# EAGLE board IGBS-Rocket-v2_rev1 (EAGLE 9.6.2), part 1 of 2
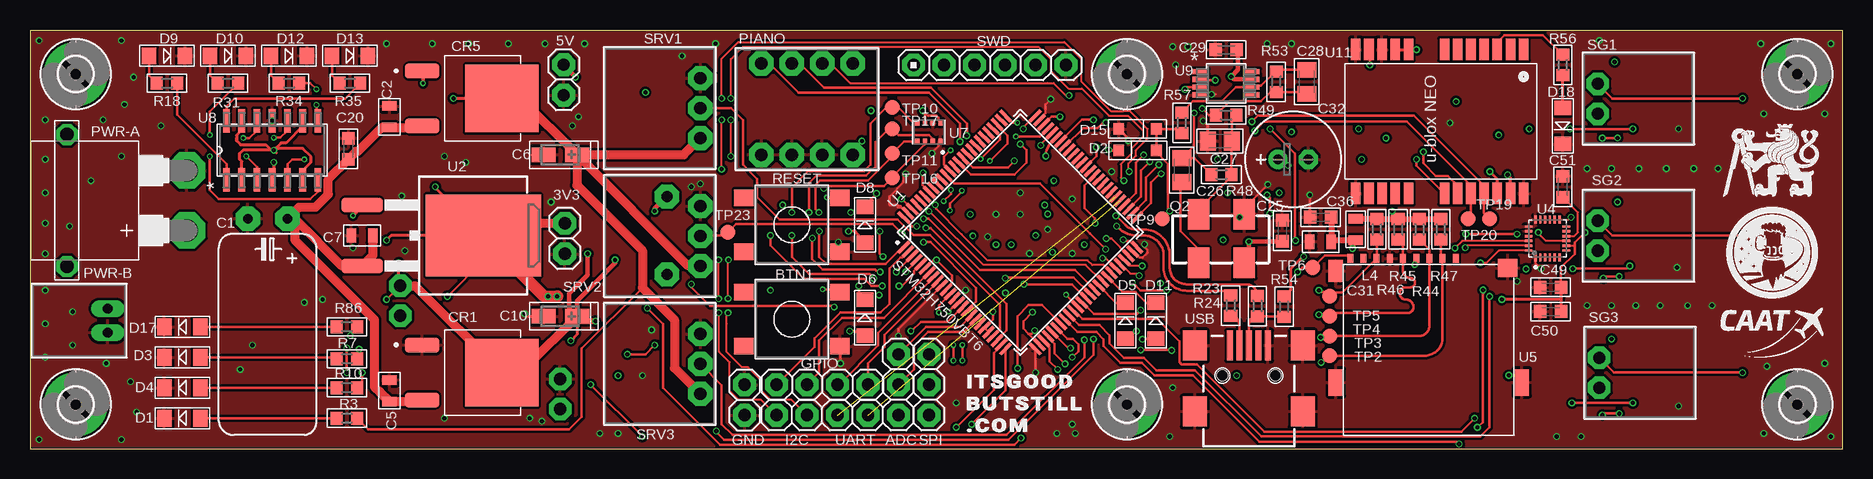
[diagram p0: board, top side]
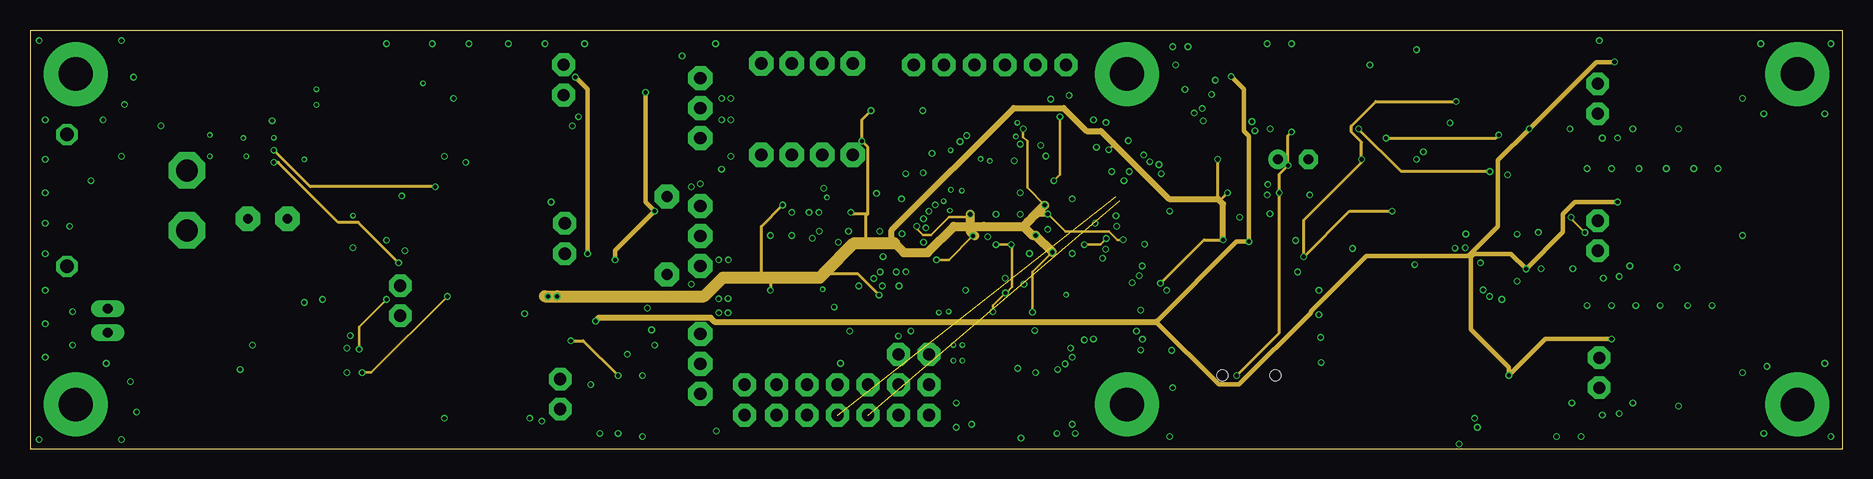
[diagram p1: board, inner layer Route2]
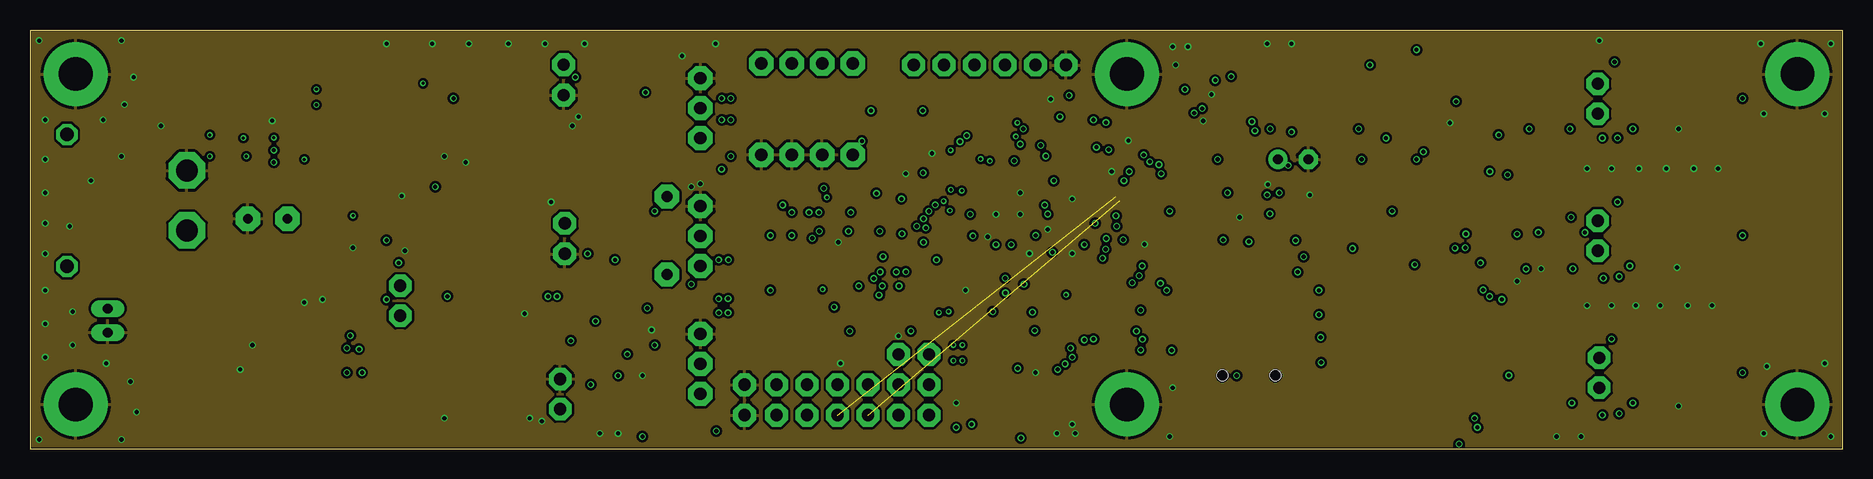
[diagram p2: board, inner layer Route15]
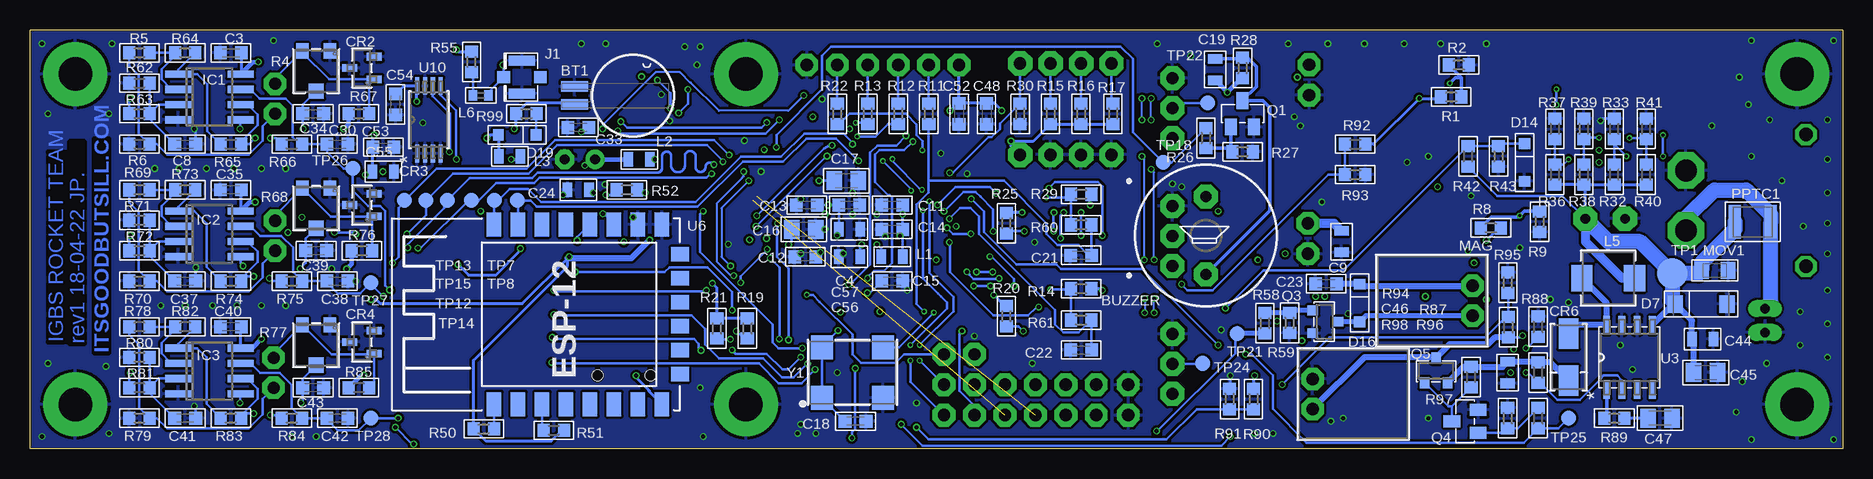
[diagram p3: board, bottom side, seen from below]

Size 151.11 x 34.92 mm. Coordinates in mm from the lower left corner, seen from the top.
Outline: 0,0 151.11,0 151.11,34.92 0,34.92 0,0
Copper layers (1*2*15*16): Top 0.035559375mm / dielectric 0.17018125mm / Route2 0.01778125mm / dielectric 47mil / Route15 0.01778125mm / dielectric 0.17018125mm / Bottom 0.035559375mm
Design rules "jlcpcb-4-layer": minimum track width 5mil, minimum drill 0.2mm, track to track 0.126490625mm, track to pad 0.126490625mm, pad to pad 0.126490625mm, via to via 0.126490625mm, smd to smd 0mil, copper to edge 0.1mm, drill to drill 5mil, minimum pad ring 4mil, minimum via ring 4mil, stop-mask expansion 3mil, vias tented up to drill 100mil, thermal gap 10mil
Net classes: 0 default: width 0.178 mm, drill 0.254 mm, clearance 0.203 mm

## Footprints (pad centres in the part's own frame; a part is rotated, then mirrored left to right if it is on the bottom)
1X02 = drill 1.016 pad 1.905 octagon: 1 -1.27,0; 2 1.27,0
CONN_S2B-XH-A_JST = drill 1.016 pad 1.88 octagon: 1 0,0; 2 2.5,0
1X03 = drill 1.016 pad 1.905 octagon: 1 -2.54,0; 2 0,0; 3 2.54,0
BATTCON-6.8MM = smd 2.25 x 0.85: + 4.87,0.75; - 4.87,-0.75
SW_B3FS-1000_OMR = smd 1.6 x 1.4: 1 -4,2.25; 2 4,2.25; 3 -4,-2.25; 4 4,-2.25
BUZZER-12MM = drill 0.914 pad 2.032 octagon: + 3.25,0; - -3.25,0
TT2D7L = drill 0.813 pad 2.032 octagon: + -1.651,-0.127; - 1.651,-0.127
0805-CAP = smd 0.8 x 1.2: 1 -0.9,0; 2 0.9,0
C0603K = smd 1.05 x 1.08: 1 -0.875,0; 2 0.875,0
CT3216 = smd 2 x 1.2: + -1.4,0; - 1.4,0
C0805K = smd 1.3 x 1.6: 1 -1,0; 2 1,0
E2,5-7 = drill 0.813 pad 1.6: + -1.27,0 | drill 0.813 pad 1.6 octagon: - 1.27,0
DPAK229P990X239-3N = smd 1.22 x 2.83: 1 -2.29,-4.14; 3 2.29,-4.14 | smd 5.63 x 6.1: 2 0,2.51
SOT23_TO-236AB_NEX = smd 0.635 x 1.27: 1 -0.95,-1.016; 2 0.95,-1.016; 3 0,1.016
DIODE_DO214AC = smd 2.54 x 1.651: 1 -1.959,0; 2 1.959,0
LED-1206 = smd 1.2 x 1.4: A -1.5,0; C 1.5,0
SOD-123 = smd 0.9 x 0.95: A 1.575,0; C -1.575,0
SMA-DIODE = smd 1.27 x 1.47: A -2.15,0; C 2.15,0
1X04 = drill 1.016 pad 1.905 octagon: 1 -3.81,0; 2 -1.27,0; 3 1.27,0; 4 3.81,0
2,8-PAD = drill 2.8 pad 5.334: B2,8 0,0
SO08 = smd 0.6 x 2.2: 1 -1.905,-2.6; 2 -0.635,-2.6; 3 0.635,-2.6; 4 1.905,-2.6; 5 1.905,2.6; 6 0.635,2.6; 7 -0.635,2.6; 8 -1.905,2.6
U.FL = smd 2.2 x 0.85: P$1 0,1.375; P$2 0,-1.375 | smd 1.05 x 1: P$3 1.525,0; P$4 -1.525,0
0805 = smd 0.8 x 1.2: 1 -0.9,0; 2 0.9,0
IND_74437_WRE = smd 1.778 x 2.21: 1 -2.201,0; 2 2.201,0
C0402 = smd 0.7 x 0.9: 1 -0.65,0; 2 0.65,0
CT/CN0805 = smd 1.2 x 1.4: 1 -1.1,0; 2 1.1,0
SW_A6FR-4101_OMR = drill 1.016 pad 2.032 octagon: 1 -7.62,7.62; 2 -7.62,5.08; 3 -7.62,2.54; 4 -7.62,0; 5 0,0; 6 0,2.54; 7 0,5.08; 8 0,7.62
1210 = smd 1 x 2.8: 1 -1.5,0; 2 1.5,0
XT30PW-M = drill 1.803 pad 3.048 octagon: + -2.5,0; - 2.5,0 | drill 1.118 pad 1.778 octagon: P$3 -5.5,10; P$4 5.5,10
CONN_S2B-PH-K-S_JST = drill 0.813 pad 1.397 long: 1 0,0; 2 2,0
SOT23-BEC = smd 1 x 1.4: B -0.95,-1.1; C 0,1.1; E 0.95,-1.1
ENC-03RC = smd 1.778 x 2.54: 1 -4.191,1.524; 2 -0.381,1.524; 3 -0.381,-2.54; 4 -4.191,-2.54
SOT23-3 = smd 0.8 x 0.9: 1 -0.95,-1; 2 0.95,-1; 3 0,1.1
R0603 = smd 1 x 1.1: 1 -0.85,0; 2 0.85,0
RES_C01R00 = smd 1.016 x 1.27: 1 1.15,-1.675; 3 -1.15,-1.675 | smd 1.27 x 1.27: 2 0,1.675
CONN_S3B-XH-A(LF)(SN)_JST = drill 1.016 pad 2.032 octagon: 1 0,0; 2 2.5,0; 3 5,0
1X06 = drill 1.016 pad 1.905 octagon: 1 -6.35,0; 2 -3.81,0; 3 -1.27,0; 4 1.27,0; 5 3.81,0; 6 6.35,0
B2,54 = smd 2.54 x 2.54: TP 0,0
B1,27 = smd 1.27 x 1.27: TP 0,0
LQFP100-14X14MM = smd 1.27 x 0.292: 1 -7.75,6; 2 -7.75,5.5; 3 -7.75,5; 4 -7.75,4.5; 5 -7.75,4; 6 -7.75,3.5; 7 -7.75,3; 8 -7.75,2.5; 9 -7.75,2; 10 -7.75,1.5; 11 -7.75,1; 12 -7.75,0.5; 13 -7.75,0; 14 -7.75,-0.5; 15 -7.75,-1; 16 -7.75,-1.5; 17 -7.75,-2; 18 -7.75,-2.5; 19 -7.75,-3; 20 -7.75,-3.5; 21 -7.75,-4; 22 -7.75,-4.5; 23 -7.75,-5; 24 -7.75,-5.5; 25 -7.75,-6; 51 7.75,-6; 52 7.75,-5.5; 53 7.75,-5; 54 7.75,-4.5; 55 7.75,-4; 56 7.75,-3.5; 57 7.75,-3; 58 7.75,-2.5; 59 7.75,-2; 60 7.75,-1.5; 61 7.75,-1; 62 7.75,-0.5; 63 7.75,0; 64 7.75,0.5; 65 7.75,1; 66 7.75,1.5; 67 7.75,2; 68 7.75,2.5; 69 7.75,3; 70 7.75,3.5; 71 7.75,4; 72 7.75,4.5; 73 7.75,5; 74 7.75,5.5; 75 7.75,6 | smd 0.292 x 1.27: 26 -6,-7.75; 27 -5.5,-7.75; 28 -5,-7.75; 29 -4.5,-7.75; 30 -4,-7.75; 31 -3.5,-7.75; 32 -3,-7.75; 33 -2.5,-7.75; 34 -2,-7.75; 35 -1.5,-7.75; 36 -1,-7.75; 37 -0.5,-7.75; 38 0,-7.75; 39 0.5,-7.75; 40 1,-7.75; 41 1.5,-7.75; 42 2,-7.75; 43 2.5,-7.75; 44 3,-7.75; 45 3.5,-7.75; 46 4,-7.75; 47 4.5,-7.75; 48 5,-7.75; 49 5.5,-7.75; 50 6,-7.75; 76 6,7.75; 77 5.5,7.75; 78 5,7.75; 79 4.5,7.75; 80 4,7.75; 81 3.5,7.75; 82 3,7.75; 83 2.5,7.75; 84 2,7.75; 85 1.5,7.75; 86 1,7.75; 87 0.5,7.75; 88 0,7.75; 89 -0.5,7.75; 90 -1,7.75; 91 -1.5,7.75; 92 -2,7.75; 93 -2.5,7.75; 94 -3,7.75; 95 -3.5,7.75; 96 -4,7.75; 97 -4.5,7.75; 98 -5,7.75; 99 -5.5,7.75; 100 -6,7.75
TO263 = smd 1.219 x 3.429: 1 -2.54,-6.6; 3 2.54,-6.6 | smd 6.8 x 9.6: 2 0,3.5
SOIC8_ONS = smd 1.493 x 0.558: 1 -2.702,1.905; 2 -2.702,0.635; 3 -2.702,-0.635; 4 -2.702,-1.905; 5 2.702,-1.905; 6 2.702,-0.635; 7 2.702,0.635; 8 2.702,1.905
QFN40P300X300X105-24N = smd 0.66 x 0.198: 1 -1.575,1; 2 -1.575,0.6; 3 -1.575,0.2; 4 -1.575,-0.2; 5 -1.575,-0.6; 6 -1.575,-1; 13 1.575,-1; 14 1.575,-0.6; 15 1.575,-0.2; 16 1.575,0.2; 17 1.575,0.6; 18 1.575,1 | smd 0.198 x 0.66: 7 -1,-1.575; 8 -0.6,-1.575; 9 -0.2,-1.575; 10 0.2,-1.575; 11 0.6,-1.575; 12 1,-1.575; 19 1,1.575; 20 0.6,1.575; 21 0.2,1.575; 22 -0.2,1.575; 23 -0.6,1.575; 24 -1,1.575
MICROSD-PUSH-OUT = smd 0.5 x 0.75: 1 9.625,0.225; 2 8.525,0.225; 3 7.425,0.225; 4 6.325,0.225; 5 5.225,0.225; 6 4.125,0.225; 7 3.025,0.225; 8 1.925,0.225; CD 0.825,0.225 | smd 1.2 x 1.8: G1 -0.375,-0.8 | smd 1.2 x 2.2: G2 -0.375,-10.1; G4 15.125,-10.1 | smd 1.6 x 1.5: G3 13.95,-0.55
ESP-12E = smd 2 x 1.2: ADC -7.46,5.53; EN -7.46,3.53; GND 7.54,-6.47; IO0 7.54,-0.47; IO2 7.54,-2.47; IO4 7.54,1.53; IO5 7.54,3.53; IO12 -7.46,-2.47; IO13 -7.46,-4.47; IO14 -7.46,-0.47; IO15 7.54,-4.47; IO16 -7.46,1.53; RST -7.46,7.53; RXD/IO3 7.54,5.53; TXD/IO1 7.54,7.53; VCC -7.46,-6.47 | smd 1.2 x 1.5: CS0 -4.96,-7.97; IO9 -0.96,-7.97; IO10 1.04,-7.97; MISO -2.96,-7.97; MOSI 3.04,-7.97; SCLK 5.04,-7.97
XDCR_BMP280 = smd 0.5 x 0.35: 1 0.8,0.975; 2 0.8,0.325; 3 0.8,-0.325; 4 0.8,-0.975; 5 -0.8,-0.975; 6 -0.8,-0.325; 7 -0.8,0.325; 8 -0.8,0.975
D14 = smd 1.97 x 0.558: 1 -2.464,3.81; 2 -2.464,2.54; 3 -2.464,1.27; 4 -2.464,0; 5 -2.464,-1.27; 6 -2.464,-2.54; 7 -2.464,-3.81; 8 2.464,-3.81; 9 2.464,-2.54; 10 2.464,-1.27; 11 2.464,0; 12 2.464,1.27; 13 2.464,2.54; 14 2.464,3.81
MSOP8_MS_MCH = smd 1.302 x 0.432: 1 -2.15,0.975; 2 -2.15,0.325; 3 -2.15,-0.325; 4 -2.15,-0.975; 5 2.15,-0.975; 6 2.15,-0.325; 7 2.15,0.325; 8 2.15,0.975
TSSOP8_MC_MCH = smd 1.462 x 0.355: 1 -2.819,0.975; 2 -2.819,0.325; 3 -2.819,-0.325; 4 -2.819,-0.975; 5 2.819,-0.975; 6 2.819,-0.325; 7 2.819,0.325; 8 2.819,0.975
NEO-M8 = smd 1.8 x 0.8: 1 6.4,-7.4; 2 6.4,-6.3; 3 6.4,-5.2; 4 6.4,-4.1; 5 6.4,-3; 6 6.4,-1.9; 7 6.4,-0.8; 8 6.4,2.2; 9 6.4,3.3; 10 6.4,4.4; 11 6.4,5.5; 12 6.4,6.6; 13 -5.6,6.6; 14 -5.6,5.5; 15 -5.6,4.4; 16 -5.6,3.3; 17 -5.6,2.2; 18 -5.6,-0.8; 19 -5.6,-1.9; 20 -5.6,-3; 21 -5.6,-4.1; 22 -5.6,-5.2; 23 -5.6,-6.3; 24 -5.6,-7.4
USB-MINIB = smd 2.5 x 0.5: D+ 2.5,0; D- 2.5,0.8; GND 2.5,-1.6; ID 2.5,-0.8; VBUS 2.5,1.6 | smd 2.5 x 2: MTN1 -3,4.5; MTN2 2.5,4.5; MTN3 -3,-4.5; MTN4 2.5,-4.5 | hole 0.9: 0,2.2; 0,-2.2
OSCILLATOR-SMD-7X5-4PAD = smd 1.8 x 2: 1 -2.54,-2.095; 2 2.54,-2.095; 3 2.54,2.104; 4 -2.54,2.104

## Placement (x,y rotation side)
3V3  [1X02]  44.58,17.53 270 top
5V  [1X02]  44.48,30.76 270 top
12V-CAM  S2B-XH-A(LF)(SN)CONN_S2B-XH-A_JST  [CONN_S2B-XH-A_JST]  44.2,3.3 90 bottom
ADC  [1X03]  72.39,5.33 270 top
BT1  MS621FE-3V  [BATTCON-6.8MM]  100.84,29.46 180 bottom
BTN1  B3FS-1000SW_B3FS-1000_OMR  [SW_B3FS-1000_OMR]  63.5,10.79 0 top
BUZZER  BUZZERPTH  [BUZZER-12MM]  53.09,17.78 90 bottom
C1  680u  [TT2D7L]  19.81,19.05 180 top
C2  10u  [0805-CAP]  29.97,27.69 90 top
C3  100n  [C0603K]  134.37,33.02 0 bottom
C4  100n  [C0603K]  82.8,20.32 180 bottom
C5  10u  [0805-CAP]  29.97,4.83 90 top
C6  10u Tant  [CT3216]  44.2,24.51 180 top
C7  10u  [0805-CAP]  27.69,17.78 180 top
C8  1u  [C0603K]  138.18,25.4 180 bottom
C9  10u  [0805-CAP]  41.78,17.27 270 bottom
C10  10u Tant  [CT3216]  44.2,11.05 180 top
C11  100n  [C0603K]  79.25,20.32 0 bottom
C12  100n  [C0603K]  86.49,16 0 bottom
C13  100n  [C0603K]  86.36,20.32 0 bottom
C14  100n  [C0603K]  79.25,18.29 0 bottom
C15  100n  [C0603K]  79.25,13.97 180 bottom
C16  2u2  [C0805K]  86.61,18.29 0 bottom
C17  2u2  [C0805K]  83.06,22.35 180 bottom
C18  100n  [C0603K]  82.3,2.29 180 bottom
C19  10u  [0805-CAP]  52.32,31.62 90 bottom
C20  100n  [C0603K]  26.54,25.02 270 top
C21  100n  [C0603K]  63.5,16.13 180 bottom
C22  100n  [C0603K]  63.5,8.23 180 bottom
C23  100n  [C0603K]  43.08,13.76 180 bottom
C24  10u  [0805-CAP]  105.41,21.59 180 bottom
C25  100n  [C0603K]  104.39,18.16 270 top
C26  4u7  [C0805K]  96.01,23.24 270 top
C27  4u7  [C0805K]  99.19,25.65 180 top
C28  1u8  [C0805K]  106.43,30.61 90 top
C29  100n  [C0603K]  99.69,33.27 0 top
C30  1u  [C0603K]  125.48,25.4 180 bottom
C31  10u  [0805-CAP]  107.57,17.27 180 top
C32  330u  [E2,5-7]  105.28,24.13 0 top
C33  100n  [C0603K]  105.41,26.8 180 bottom
C34  1u  [C0603K]  127.51,27.94 180 bottom
C35  100n  [C0603K]  134.37,21.59 0 bottom
C36  100n  [C0603K]  107.57,19.3 180 top
C37  1u  [C0603K]  138.18,13.97 180 bottom
C38  1u  [C0603K]  125.48,13.97 180 bottom
C39  1u  [C0603K]  127.25,16.51 180 bottom
C40  100n  [C0603K]  134.37,10.16 0 bottom
C41  1u  [C0603K]  138.18,2.54 180 bottom
C42  1u  [C0603K]  125.48,2.54 180 bottom
C43  1u  [C0603K]  127.51,5.08 180 bottom
C44  22u  [0805-CAP]  11.68,9.14 0 bottom
C45  100n  [C0805K]  11.43,6.35 180 bottom
C46  22u  [0805-CAP]  27.94,6.35 270 bottom
C47  10n  [C0805K]  15.24,2.54 180 bottom
C48  100n  [C0603K]  71.37,27.94 90 bottom
C49  100n  [C0603K]  126.75,13.46 0 top
C50  100n  [C0603K]  126.75,11.43 0 top
C51  100n  [C0603K]  127.76,21.84 270 top
C52  100n  [C0603K]  73.66,27.94 90 bottom
C53  100n  [C0603K]  121.67,25.15 0 bottom
C54  100n  [C0603K]  120.65,28.7 270 bottom
C55  10u  [0805-CAP]  121.67,23.11 0 bottom
C56  10u  [0805-CAP]  82.8,16 180 bottom
C57  10u  [0805-CAP]  82.8,18.29 0 bottom
CR1  LD1117DT50  [DPAK229P990X239-3N]  36.83,6.35 270 top
CR2  TS4040DILT-2.5  [SOT23_TO-236AB_NEX]  123.44,31.75 90 bottom
CR3  TS4040DILT-2.5  [SOT23_TO-236AB_NEX]  123.44,20.32 90 bottom
CR4  TS4040DILT-2.5  [SOT23_TO-236AB_NEX]  123.44,8.89 90 bottom
CR5  AZ2185D  [DPAK229P990X239-3N]  36.83,29.21 270 top
CR6  SS12  [DIODE_DO214AC]  22.86,7.62 90 bottom
D1  GREEN  [LED-1206]  12.7,2.54 180 top
D2  3V6  [SOD-123]  92.33,24.89 0 top
D3  GREEN  [LED-1206]  12.7,7.62 180 top
D4  GREEN  [LED-1206]  12.7,5.08 180 top
D5  GREEN  [LED-1206]  91.31,10.67 90 top
D6  GREEN  [LED-1206]  69.6,10.92 90 top
D7  TVSSMA  [SMA-DIODE]  11.81,12.06 180 bottom
D8  GREEN  [LED-1206]  69.6,18.67 90 top
D9  GREEN  [LED-1206]  11.43,32.77 0 top
D10  GREEN  [LED-1206]  16.51,32.77 0 top
D11  GREEN  [LED-1206]  93.85,10.67 90 top
D12  GREEN  [LED-1206]  21.59,32.77 0 top
D13  GREEN  [LED-1206]  26.67,32.77 0 top
D14  3V6  [SOD-123]  26.54,23.88 270 bottom
D15  3V6  [SOD-123]  92.33,26.67 180 top
D16  1N4148  [SOD-123]  40.27,12.15 270 bottom
D17  GREEN  [LED-1206]  12.7,10.16 180 top
D18  GREEN  [LED-1206]  127.76,26.92 270 top
D19  1N4148  [SOD-123]  110.49,26.16 180 bottom
GND  [1X02]  59.56,4.06 90 top
GPIO  [1X04]  66.04,5.33 0 top
H1  MOUNT-PAD-ROUND2.8  [2,8-PAD]  147.32,31.24 0 top
H2  MOUNT-PAD-ROUND2.8  [2,8-PAD]  147.32,3.68 0 top
H3  MOUNT-PAD-ROUND2.8  [2,8-PAD]  3.81,3.68 0 top
H4  MOUNT-PAD-ROUND2.8  [2,8-PAD]  3.81,31.24 0 top
H5  MOUNT-PAD-ROUND2.8  [2,8-PAD]  91.44,31.24 0 top
H6  MOUNT-PAD-ROUND2.8  [2,8-PAD]  91.44,3.68 0 top
I2C  [1X02]  63.5,2.79 180 top
IC1  NCV21872DR2G  [SO08]  136.14,29.34 270 bottom
IC2  NCV21872DR2G  [SO08]  136.14,17.91 270 bottom
IC3  NCV21872DR2G  [SO08]  136.14,6.48 270 bottom
J1  U.FL  [U.FL]  110.11,30.99 180 bottom
L1  10uH  [0805]  79.25,16 0 bottom
L2  10uH  [0805]  100.33,24.13 180 bottom
L3  10uH  [0805]  111.12,24.38 0 bottom
L4  10uH  [0805]  110.49,18.29 270 top
L5  22u  [IND_74437_WRE]  19.56,14.22 0 bottom
L6  27nH  [C0402]  113.54,29.46 180 bottom
MAG  S2B-XH-A(LF)(SN)CONN_S2B-XH-A_JST  [CONN_S2B-XH-A_JST]  30.86,13.59 270 bottom
MOV1  10 V  [CT/CN0805]  10.67,14.86 0 bottom
PIANO  A6FR-4101SW_A6FR-4101_OMR  [SW_A6FR-4101_OMR]  60.96,24.51 270 top
PPTC1  10V/8A  [1210]  7.49,18.92 180 bottom
PWR-A  XT30PW-M  [XT30PW-M]  13.08,20.7 90 top
PWR-B  S2B-PH-K-S  [CONN_S2B-PH-K-S_JST]  6.48,11.68 270 top
Q1  BC817  [SOT23-BEC]  50.04,27.94 0 bottom
Q2  ENC-03  [ENC-03RC]  101.6,18.03 0 top
Q3  BSS316N  [SOT23-3]  43.19,10.58 270 bottom
Q4  BC817  [SOT23-BEC]  31.5,2.29 90 bottom
Q5  BSS314PE  [SOT23-3]  33.91,6.48 0 bottom
R1  150R  [R0603]  32.64,29.34 180 bottom
R2  560R  [R0603]  32,32 180 bottom
R3  1K8  [R0603]  26.42,2.54 0 top
R4  500k  [RES_C01R00]  127.25,31.5 180 bottom
R5  10k  [R0603]  141.99,33.02 180 bottom
R6  360R  [R0603]  141.99,25.4 180 bottom
R7  1K5  [R0603]  26.42,7.49 0 top
R8  240R  [R0603]  29.34,18.41 0 bottom
R9  390R  [R0603]  25.27,18.92 90 bottom
R10  1K  [R0603]  26.42,5.08 0 top
R11  22R  [R0603]  76.2,27.94 270 bottom
R12  22R  [R0603]  78.74,27.94 270 bottom
R13  22R  [R0603]  81.28,27.94 270 bottom
R14  10K  [R0603]  63.5,13.34 180 bottom
R15  10K  [R0603]  66.04,27.94 270 bottom
R16  10K  [R0603]  63.5,27.94 270 bottom
R17  10K  [R0603]  60.83,27.94 270 bottom
R18  1K5  [R0603]  11.43,30.48 0 top
R19  1K  [R0603]  91.31,10.03 90 bottom
R20  1K  [R0603]  69.72,11.05 90 bottom
R21  1K  [R0603]  93.85,10.03 90 bottom
R22  22R  [R0603]  83.82,27.94 270 bottom
R23  22R  [R0603]  100.09,11.94 90 top
R24  22R  [R0603]  102.32,11.9 90 top
R25  1K  [R0603]  69.72,18.8 90 bottom
R26  1K  [R0603]  53.09,25.91 90 bottom
R27  10K  [R0603]  50.04,24.77 180 bottom
R28  1K  [R0603]  50.04,31.75 90 bottom
R29  10K  [R0603]  63.5,21.21 180 bottom
R30  10K  [R0603]  68.58,27.94 270 bottom
R31  1K5  [R0603]  16.51,30.48 0 top
R32  10k  [R0603]  19.05,22.86 270 bottom
R33  6k8  [R0603]  19.05,26.67 270 bottom
R34  1K5  [R0603]  21.59,30.48 0 top
R35  1K5  [R0603]  26.67,30.48 0 top
R36  10k  [R0603]  24,22.86 270 bottom
R37  7k5  [R0603]  24,26.67 270 bottom
R38  12k  [R0603]  21.59,22.86 270 bottom
R39  10k  [R0603]  21.59,26.67 270 bottom
R40  10k  [R0603]  16.38,22.86 270 bottom
R41  9k1  [R0603]  16.38,26.67 270 bottom
R42  12k  [R0603]  31.24,24.38 270 bottom
R43  6k8  [R0603]  28.7,24.38 90 bottom
R44  47k  [R0603]  115.82,18.29 90 top
R45  47k  [R0603]  114.05,18.29 90 top
R46  47k  [R0603]  112.27,18.29 90 top
R47  47k  [R0603]  117.6,18.29 90 top
R48  100k  [R0603]  99.31,22.86 180 top
R49  10k  [R0603]  99.69,27.81 180 top
R50  10k  [R0603]  113.28,1.65 180 bottom
R51  10k  [R0603]  107.44,1.52 0 bottom
R52  10k  [R0603]  101.35,21.59 180 bottom
R53  59k  [R0603]  103.89,30.61 270 top
R54  1K5  [R0603]  104.54,11.84 90 top
R55  10R  [R0603]  114.3,32.26 90 bottom
R56  1k  [R0603]  127.76,32 90 top
R57  1k  [R0603]  96.01,27.18 90 top
R58  22R  [R0603]  48.17,10.46 90 bottom
R59  100k  [R0603]  46.12,10.49 90 bottom
R60  1K  [R0603]  63.5,18.67 0 bottom
R61  1K  [R0603]  63.5,10.72 0 bottom
R62  360R  [R0603]  141.99,30.48 180 bottom
R63  360R  [R0603]  141.99,27.94 0 bottom
R64  470k  [R0603]  138.18,33.02 180 bottom
R65  20k  [R0603]  134.37,25.4 180 bottom
R66  470k  [R0603]  129.29,25.4 180 bottom
R67  330R  [R0603]  123.7,27.94 180 bottom
R68  500k  [RES_C01R00]  127.25,20.07 180 bottom
R69  10k  [R0603]  141.99,21.59 180 bottom
R70  360R  [R0603]  141.99,13.97 180 bottom
R71  360R  [R0603]  141.99,19.05 180 bottom
R72  360R  [R0603]  141.99,16.51 0 bottom
R73  470k  [R0603]  138.18,21.59 180 bottom
R74  20k  [R0603]  134.37,13.97 180 bottom
R75  470k  [R0603]  129.29,13.97 180 bottom
R76  330R  [R0603]  123.44,16.51 180 bottom
R77  500k  [RES_C01R00]  127.25,8.64 180 bottom
R78  10k  [R0603]  141.99,10.16 180 bottom
R79  360R  [R0603]  141.99,2.54 180 bottom
R80  360R  [R0603]  141.99,7.62 180 bottom
R81  360R  [R0603]  141.99,5.08 0 bottom
R82  470k  [R0603]  138.18,10.16 180 bottom
R83  20k  [R0603]  134.37,2.54 180 bottom
R84  470k  [R0603]  129.29,2.54 180 bottom
R85  330R  [R0603]  123.7,5.08 180 bottom
R86  3K6  [R0603]  26.42,10.16 0 top
R87  4.87k  [R0603]  25.4,6.35 90 bottom
R88  1.27k  [R0603]  25.4,10.16 270 bottom
R89  5k  [R0603]  19.05,2.54 180 bottom
R90  4k7  [R0603]  49.13,4.13 90 bottom
R91  7k5  [R0603]  51.12,4.15 270 bottom
R92  10k  [R0603]  40.64,25.4 0 bottom
R93  10k  [R0603]  40.64,22.86 180 bottom
R94  30k  [R0603]  27.88,10.12 270 bottom
R95  10k  [R0603]  27.93,13.85 270 bottom
R96  1K  [R0603]  25.4,2.54 270 bottom
R97  4k7  [R0603]  30.99,5.97 270 bottom
R98  10K  [R0603]  27.94,2.54 270 bottom
R99  1k  [R0603]  109.73,27.94 180 bottom
RESET  B3FS-1000SW_B3FS-1000_OMR  [SW_B3FS-1000_OMR]  63.5,18.67 0 top
SG1  S3B-XH-A  [CONN_S2B-XH-A_JST]  130.68,27.94 90 top
SG2  S3B-XH-A  [CONN_S2B-XH-A_JST]  130.68,16.51 90 top
SG3  S3B-XH-A  [CONN_S2B-XH-A_JST]  130.81,5.08 90 top
SPI  [1X03]  74.93,5.33 270 top
SRV1  S3B-XH-A  [CONN_S3B-XH-A(LF)(SN)_JST]  55.88,25.91 90 top
SRV2  S3B-XH-A(LF)(SN)CONN_S3B-XH-A(LF)(SN)_JST  [CONN_S3B-XH-A(LF)(SN)_JST]  55.88,15.24 90 top
SRV3  S3B-XH-A(LF)(SN)CONN_S3B-XH-A(LF)(SN)_JST  [CONN_S3B-XH-A(LF)(SN)_JST]  55.88,4.57 90 top
SWD  [1X06]  80.01,32 0 top
TP1  TPB2,54  [B2,54]  14.22,14.61 0 bottom
TP2  TPB1,27  [B1,27]  108.33,7.75 0 top
TP3  TPB1,27  [B1,27]  108.33,9.4 0 top
TP4  TPB1,27  [B1,27]  108.33,11.05 0 top
TP5  TPB1,27  [B1,27]  108.33,12.7 0 top
TP6  TPB1,27  [B1,27]  106.93,15.11 0 top
TP7  TPB1,27  [B1,27]  112.39,20.7 0 bottom
TP8  TPB1,27  [B1,27]  110.49,20.7 0 bottom
TP9  TPB1,27  [B1,27]  94.36,19.18 0 top
TP10  TPB1,27  [B1,27]  71.88,28.45 0 top
TP11  TPB1,27  [B1,27]  71.88,24.64 90 top
TP12  TPB1,27  [B1,27]  116.33,20.7 0 bottom
TP13  TPB1,27  [B1,27]  119.89,20.7 0 bottom
TP14  TPB1,27  [B1,27]  114.3,20.7 0 bottom
TP15  TPB1,27  [B1,27]  118.11,20.7 0 bottom
TP16  TPB1,27  [B1,27]  71.88,22.61 0 top
TP17  TPB1,27  [B1,27]  71.88,26.67 0 top
TP18  TPB1,27  [B1,27]  56.64,23.88 0 bottom
TP19  TPB1,27  [B1,27]  121.67,19.18 0 top
TP20  TPB1,27  [B1,27]  119.89,19.18 0 top
TP21  TPB1,27  [B1,27]  50.49,9.6 0 bottom
TP22  TPB1,27  [B1,27]  52.96,28.83 0 bottom
TP23  TPB1,27  [B1,27]  58.17,18.03 0 top
TP24  TPB1,27  [B1,27]  53.34,7.11 0 bottom
TP25  TPB1,27  [B1,27]  22.86,2.54 0 bottom
TP26  TPB1,27  [B1,27]  124.21,23.37 0 bottom
TP27  TPB1,27  [B1,27]  122.68,13.84 0 bottom
TP28  TPB1,27  [B1,27]  122.68,2.54 0 bottom
U1  STM32H750VBT6  [LQFP100-14X14MM]  82.55,18.03 45 top
U2  LM317BD2TG  [TO263]  34.29,17.78 270 top
U3  CS5171EDR8G  [SOIC8_ONS]  17.78,7.62 90 bottom
U4  MPU-9250  [QFN40P300X300X105-24N]  126.49,17.53 90 top
U5  MICROSD  [MICROSD-PUSH-OUT]  109.22,15.62 0 top
U6  ESP-12E/F  [ESP-12E]  104.9,11.18 90 bottom
U7  BMP280  [XDCR_BMP280]  74.93,26.42 270 top
U8  LP324DRG4  [D14]  20.19,24.89 90 top
U9  MCP6V51T-E/MS  [MSOP8_MS_MCH]  99.69,30.48 0 top
U10  24AA32A-I/ST  [TSSOP8_MC_MCH]  117.86,27.43 90 bottom
U11  u-blox NEO-M6  [NEO-M8]  117.11,26.9 90 top
UART  [1X02]  68.58,2.79 180 top
USB  USB-MINIB-5PIN  [USB-MINIB]  101.6,6.1 90 top
Y1  24MHz  [OSCILLATOR-SMD-7X5-4PAD]  82.55,6.35 0 bottom

## Library data of the parts
3V3 5V ADC GND GPIO I2C SPI UART = pinhead2-nopin
12V-CAM MAG SG1-SG3 = jst-XH2; COPYRIGHT: Copyright (C) 2022 Ultra Librarian. All rights reserved.; MANUFACTURER_PART_NUMBER: S2B-XH-A(LF)(SN); MFR_NAME: JST
BT1 = SparkFun-Batteries; PROD_ID: BATT-13734
BTN1 RESET = switch_btn; COPYRIGHT: Copyright (C) 2022 Ultra Librarian. All rights reserved.; MANUFACTURER_PART_NUMBER: B3FS-1000; MFR_NAME: Omron
BUZZER = SparkFun-Electromechanical
C1 C3 C4 C6 C8 C10-C18 C20-C23 C25-C30 C32-C43 C45 C47-C54 L1-L4 L6 R1-R3 R5-R67 R69-R76 R78-R89 R91-R99 = rcl2
C2 C5 C7 C9 C19 C24 C31 C44 C46 C55-C57 = SparkFun-Capacitors; PROD_ID: CAP-11330
CR1 CR5 = ldo
CR2-CR4 = ref; COPYRIGHT: Copyright (C) 2022 Ultra Librarian. All rights reserved.; MANUFACTURER_PART_NUMBER: TL431QDBZR,215; MFR_NAME: Nexperia
CR6 = diode2; COPYRIGHT: Copyright (C) 2022 Ultra Librarian. All rights reserved.; MANUFACTURER_PART_NUMBER: SS12-E3/5AT; MFR_NAME: Vishay
D1 D3-D6 D8-D13 D17 D18 = leds; PROD_ID: DIO-00862
D2 D14 D15 = SparkFun-DiscreteSemi; PROD_ID: DIO-12440
D7 D16 D19 = SparkFun-DiscreteSemi
H1-H6 = holes3
IC1-IC3 = opamps
J1 = SparkFun-Connectors; PROD_ID: CONN-09193
L5 = rcl2; COPYRIGHT: Copyright (C) 2022 Ultra Librarian. All rights reserved.; MANUFACTURER_PART_NUMBER: 744373240047; MFR_NAME: Wurth Electronics
MOV1 = varistor2
PIANO = switch_btn; COPYRIGHT: Copyright (C) 2022 Ultra Librarian. All rights reserved.; MANUFACTURER_PART_NUMBER: A6FR-4101; MFR_NAME: Omron
PPTC1 = SparkFun-Fuses; PROD_ID: RES-14313
PWR-A = jst-XH2
PWR-B = jst-XH2; COPYRIGHT: Copyright (C) 2022 Ultra Librarian. All rights reserved.; MANUFACTURER_PART_NUMBER: S2B-PH-K-S(LF)(SN); MFR_NAME: JST
Q1 Q4 = transistor-npn
Q2 = gyro
Q3 = SparkFun-DiscreteSemi; PROD_ID: TRANS-08345
Q5 = SparkFun-DiscreteSemi; PROD_ID: TRANS-08285
R4 R68 R77 = trimmer; COPYRIGHT: Copyright (C) 2022 Ultra Librarian. All rights reserved.; MANUFACTURER_PART_NUMBER: PVG3A103C01R00; MFR_NAME: Bourns Electronics
R90 = rcl2; SPICEPREFIX: R
SRV1-SRV3 = jst-XH2; COPYRIGHT: Copyright (C) 2022 Ultra Librarian. All rights reserved.; MANUFACTURER_PART_NUMBER: S3B-XH-A(LF)(SN); MFR_NAME: JST
SWD = pinhead2
TP1-TP28 = testpad2
U1 = stm; COPYRIGHT: Copyright (C) 2022 Ultra Librarian. All rights reserved.; MANUFACTURER_PART_NUMBER: STM32H750VBT6; MFR_NAME: STMicroelectronics
U2 = linreg
U3 = dc-dc; COPYRIGHT: Copyright (C) 2022 Ultra Librarian. All rights reserved.; MANUFACTURER_PART_NUMBER: CS5171EDR8G; MFR_NAME: onsemi
U4 = gyro; DESCRIPTION: SMD Gyroscope/Accelerometer/Magnetometer Sensor; 9-AXIS; DIGI-KEY_PART_NUMBER: 1428-1019-1-ND; DIGI-KEY_PURCHASE_URL: https://www.digikey.in/product-detail/en/tdk-invensense/MPU-9250/1428-1019-1-ND/4626450?utm_source=snapeda&utm_medium=aggregator&utm_campaign=symbol; MF: TDK InvenSense; MP: MPU-9250; NOTES: The center Exposed Pad (EP), for MPU devices is a No Connect (NC) pad. To avoid package stress, do not solder the EP to the PCB. Please refer to the document “AN-IVS-0002A-00”. As a result of these guidelines, the exposed pad has not been included on the PCB footprint. We’ve added a keep-out area under the exposed pad. Please don’t route traces or vias under the part, on the same side of the board; PACKAGE: QFN-24 TDK InvenSense
U5 = microsd
U6 = esp-12e-f
U7 = gyro; MANUFACTURER: Bosch; MP: BMP280; PART_REV: 1.19; STANDARD: MANUFACTURER RECOMMENDATIONS
U8 = opamps; COPYRIGHT: Copyright (C) 2022 Ultra Librarian. All rights reserved.; MANUFACTURER_PART_NUMBER: LP324DRG4; MFR_NAME: Texas Instruments
U9 = opamps; COPYRIGHT: Copyright (C) 2022 Ultra Librarian. All rights reserved.; MANUFACTURER_PART_NUMBER: MCP6V51T-E/MS; MFR_NAME: Microchip
U10 = eeprom; COPYRIGHT: Copyright (C) 2022 Ultra Librarian. All rights reserved.; MANUFACTURER_PART_NUMBER: 24AA32A-I/ST; MFR_NAME: Microchip
U11 = gps
USB = usb; PROD_ID: CONN-08193
Y1 = SparkFun-Clocks; PROD_ID: XTAL-11225

## Nets
3V3: 3V3.1 C4.2 C9.1 C11.2 C12.2 C13.2 C14.2 C18.2 C48.2 C49.2 C50.2 C52.2 C54.1 C57.1 D2.C L1.2 L2.1 L3.2 L4.1 PIANO.8 R8.2 R10.2 R14.1 R15.2 R16.2 R17.2 R19.2 R20.2 R21.2 R25.2 R29.1 R44.2 R45.2 R46.2 R47.2 R50.2 R51.2 R52.1 R54.2 SWD.1 U1.6 U1.11 U1.27 U1.50 U1.75 U1.100 U2.2 U4.8 U4.13 U7.6 U7.8 U8.2 U8.6 U8.9 U8.13 U10.8 Y1.1 Y1.4
3V3-ESP: C24.1 C32.+ C33.1 L2.2 U6.VCC
3V3-SD: C31.1 C36.1 L4.2 U5.4
5V: 5V.1 BUZZER.+ C3.2 C10.+ C19.1 C23.1 C25.2 C29.2 C35.2 C40.2 CR1.2 D16.C IC1.8 IC2.8 IC3.8 MAG.1 Q2.3 R7.2 R28.1 R67.2 R76.2 R85.2 R90.2 U8.4 U9.7
5V-BUZZER: BUZZER.- C19.2 Q1.C R28.2
5V-MAG: D16.A MAG.2 Q3.3
5V-SCALED: R90.1 R91.2 U1.24
6V: C6.+ CR5.2 R1.2 R3.2 R92.2 SRV1.1 SRV2.1 SRV3.1
6V-SCALED: R92.1 R93.2 U1.16
12V: 12V-CAM.1 Q5.3 R86.2 R94.2
12V-FB: CR6.2 L5.1 U3.8
12V-HOT: C46.1 CR6.1 Q5.2 R87.2 R97.1
12V-SCALED: R94.1 R95.2 U1.25
ADC-AUX-1: ADC.1 U1.17
ADC-AUX-2: ADC.2 U1.18
ADC-AUX-3: ADC.3 U1.15
AGND: U1.19
ANG-RATE: D2.A D15.C R57.1 TP9.TP U1.30
ANG-RATE2: C28.2 R53.1 R57.2 U9.6
BAT: C1.+ C2.1 C5.1 C7.1 C20.2 C44.1 C45.2 CR1.3 CR5.3 D7.C L5.2 MOV1.1 PPTC1.2 R32.2 R36.2 R38.2 R40.2 R42.2 TP1.TP U2.3 U3.5
BAT2: PPTC1.1 PWR-A.+ PWR-B.1
BAT-SCALED: D14.C R42.1 R43.2 U1.32
BMP-CS: TP17.TP U1.3 U7.2
BMP-MISO: TP10.TP U1.4 U7.5
BMP-MOSI: TP16.TP U1.5 U7.3
BMP-SCK: TP11.TP U1.1 U7.4
BOOT0: PIANO.1 R30.1 U1.94
BTN1: C22.1 R61.2 U1.40
BTN12: BTN1.2 R14.2 R61.1
BUZZER: R26.2 TP18.TP U1.63
CTRL-12V: R96.2 TP25.TP U1.98
ESP-IO0: PIANO.2 R15.1 U6.IO0
ESP-RX: TP8.TP U1.86 U6.RXD/IO3
ESP-TX: TP7.TP U1.87 U6.TXD/IO1
GND: 3V3.2 5V.2 12V-CAM.2 BT1.- BTN1.4 C1.- C2.2 C3.1 C4.1 C5.2 C6.- C7.2 C8.1 C9.2 C10.- C11.1 C12.1 C13.1 C14.1 C15.1 C16.2 C17.1 C18.1 C20.1 C21.2 C22.2 C23.2 C24.2 C25.1 C27.2 C29.1 C30.1 C31.2 C32.- C33.2 C34.1 C35.1 C36.2 C37.1 C38.1 C39.1 C40.1 C41.1 C42.1 C43.1 C44.2 C45.1 C46.2 C47.1 C48.1 C49.1 C50.1 C51.1 C52.1 C53.2 C54.2 C55.2 C56.2 C57.2 CR1.1 CR2.2 CR2.3 CR3.2 CR3.3 CR4.2 CR4.3 D1.C D3.C D4.C D7.A D9.C D10.C D12.C D13.C D14.A D15.A D17.C D18.C GND.1 GND.2 H1.B2,8 H2.B2,8 H3.B2,8 H4.B2,8 H5.B2,8 H6.B2,8 IC1.4 IC2.4 IC3.4 J1.P$1 J1.P$2 MOV1.2 PIANO.5 PIANO.6 PIANO.7 PWR-A.- PWR-B.2 Q1.E Q2.2 Q3.2 Q4.E R2.1 R4.3 R6.2 R9.1 R27.1 R30.2 R33.1 R37.1 R39.1 R41.1 R43.1 R59.1 R62.2 R68.3 R70.2 R71.2 R77.3 R79.2 R80.2 R88.1 R91.1 R93.1 R95.1 R98.1 RESET.4 SRV1.3 SRV2.3 SRV3.3 SWD.6 U1.10 U1.26 U1.49 U1.74 U1.99 U3.6 U3.7 U4.1 U4.18 U4.19 U4.20 U5.6 U5.G1 U5.G2 U5.G3 U5.G4 U6.GND U6.IO15 U7.1 U7.7 U8.11 U9.4 U10.1 U10.2 U10.3 U10.4 U10.7 U11.10 U11.12 U11.13 U11.24 USB.GND USB.MTN1 USB.MTN2 USB.MTN3 USB.MTN4 Y1.2
GPIO-AUX-IN1: GPIO.1 U1.2
GPIO-AUX-IN2: GPIO.2 U1.7
GPIO-AUX-OUT1: GPIO.3 U1.8
GPIO-AUX-OUT2: GPIO.4 U1.9
GPS-RF-IN: J1.P$3 L6.1 U11.11
GPS-RX: TP19.TP U1.68 U11.21
GPS-TX: TP20.TP U1.69 U11.20
GPS-VBCKP: BT1.+ R99.2 U11.22
GPS-VBCKP2: D19.C R99.1
GPS-VCC: C53.1 C55.1 D19.A L3.1 U11.23
GPS-VCC-RF: R55.2 U11.8 U11.9
I2C-AUX-SCL: I2C.2 U1.46
I2C-AUX-SDA: I2C.1 U1.47
ICM-CS: TP14.TP U1.51 U4.22
ICM-MISO: TP15.TP U1.53 U4.9
ICM-MOSI: TP13.TP U1.54 U4.24
ICM-SCK: TP12.TP U1.52 U4.23
LED1-BLUE: D5.C U1.41
LED2-YELLOW: D6.C U1.42
LED3-RED: D11.C U1.43
LED4-WHITE: D8.C U1.44
MAG: R58.1 TP21.TP U1.45
N$1: D8.A R25.1
N$2: R69.2 R70.1 SG2.1
N$4: C16.1 U1.48
N$5: C17.2 U1.73
N$6: R11.1 SWD.2
N$7: U1.12 Y1.3
N$8: R12.1 SWD.3
N$9: CR5.1 R1.1 R2.2
N$10: D1.A R3.1
N$11: R5.2 R6.1 SG1.1
N$12: C8.2 IC1.3 R62.1 R63.2
N$13: D3.A R7.1
N$14: R13.1 SWD.4
N$15: R8.1 R9.2 U2.1
N$16: D4.A R10.1
N$17: R22.1 SWD.5
N$18: R87.1 R88.2 U3.2
N$19: R23.1 USB.D-
N$20: C37.2 IC2.3 R71.1 R72.2
N$21: D5.A R19.1
N$22: D6.A R20.1
N$23: D11.A R21.1
N$24: IC1.2 R5.1 R64.2
N$25: IC1.1 R64.1 R65.2
N$26: IC1.6 R65.1 R66.2
N$28: Q1.B R26.1 R27.2
N$30: D9.A R18.1
N$31: D10.A R31.1
N$32: D12.A R34.1
N$33: D13.A R35.1
N$34: R35.2 U8.14
N$35: R34.2 U8.8
N$36: R31.2 U8.7
N$37: R18.2 U8.1
N$38: R32.1 R33.2 U8.3
N$40: R36.1 R37.2 U8.5
N$41: R38.1 R39.2 U8.10
N$42: R40.1 R41.2 U8.12
N$44: Q3.1 R58.2 R59.2
N$45: C26.2 Q2.4
N$46: C26.1 R48.2 U9.3
N$47: R50.1 U6.RST
N$48: R51.1 U6.EN
N$49: C27.1 Q2.1 R48.1 R49.1
N$50: R52.2 U6.IO2
N$51: C28.1 R49.2 R53.2 U9.2
N$52: R24.1 R54.1 USB.D+
N$53: C34.2 IC1.5 R4.2
N$54: CR2.1 R4.1 R63.1 R67.1 SG1.2
N$55: IC2.2 R69.1 R73.2
N$56: IC2.1 R73.1 R74.2
N$57: IC2.6 R74.1 R75.2
N$58: C39.2 IC2.5 R68.2
N$59: D17.A R86.1
N$60: CR3.1 R68.1 R72.1 R76.1 SG2.2
N$61: R78.2 R79.1 SG3.1
N$62: C41.2 IC3.3 R80.1 R81.2
N$63: IC3.2 R78.1 R82.2
N$64: IC3.1 R82.1 R83.2
N$65: IC3.6 R83.1 R84.2
N$66: C43.2 IC3.5 R77.2
N$67: Q4.B R96.1 R98.2
N$68: CR4.1 R77.1 R81.1 R85.1 SG3.2
N$69: U10.6 U11.19
N$70: C47.2 R89.1
N$71: R89.2 U3.1
N$72: Q4.C Q5.1 R97.2
N$73: U10.5 U11.18
N$74: C51.2 U4.10
N$78: D18.A R56.1
N$79: L6.2 R55.1
N$80: R56.2 U11.3
NRST: C21.1 R11.2 R60.2 U1.14
NRST2: R29.2 R60.1 RESET.2
PIANO3: PIANO.3 R16.1 U1.38
PIANO4: PIANO.4 R17.1 U1.39
SD-CLK: R45.1 TP4.TP U1.29 U5.5
SD-CS: R47.1 TP2.TP U1.28 U5.2
SD-DETECT: TP6.TP U1.37 U5.CD
SD-MISO: R46.1 TP5.TP U1.90 U5.7
SD-MOSI: R44.1 TP3.TP U1.31 U5.3
SG1: C30.2 IC1.7 R66.1 TP26.TP U1.33
SG2: C38.2 IC2.7 R75.1 TP27.TP U1.34
SG3: C42.2 IC3.7 R84.1 TP28.TP U1.35
SPI-AUX-MISO: SPI.2 U1.79
SPI-AUX-MOSI: SPI.1 U1.36
SPI-AUX-SCK: SPI.3 U1.78
SRV1: SRV1.2 TP22.TP U1.22
SRV2: SRV2.2 TP23.TP U1.23
SRV3: SRV3.2 TP24.TP U1.61
SWCLK: R13.2 U1.76
SWDIO: R12.2 U1.72
SWO: R22.2 U1.89
UART-AUX-RX: U1.55 UART.1
UART-AUX-TX: U1.56 UART.2
USB-5V: USB.VBUS
USB-DM: R23.2 U1.70
USB-DP: R24.2 U1.71
VDDA: C15.2 C56.1 L1.1 U1.20 U1.21